# Altium PCB WCH_hairDrierCore_V1.5.PcbDoc (part 7 of 7)
Units mil, origin at the board's own origin, x right, y up, seen from the top; angles counter-clockwise.
Board outline 1683.54 x 992.13 mil, 4 copper layers (Top Layer, Mid-Layer 1, Mid-Layer 2, Bottom Layer); 84 components, 65 nets, 249 pads, 160 vias.
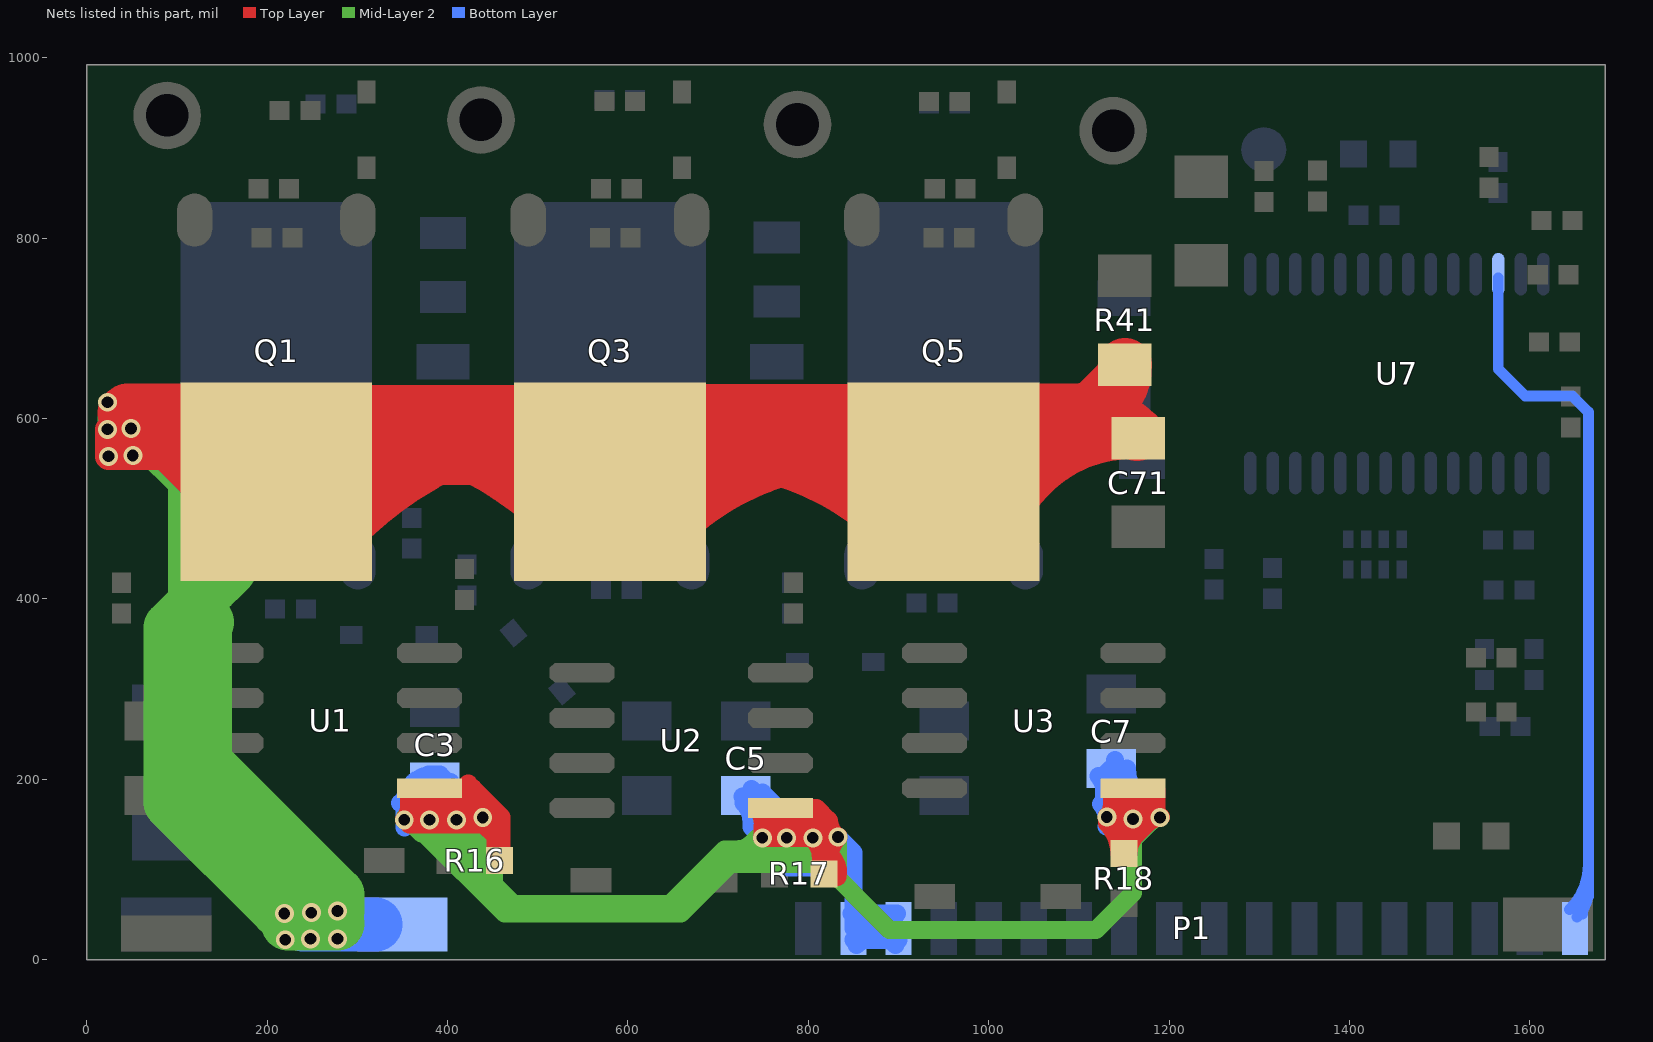
[diagram p9: the nets of this part, all layers, seen from the top]

## Via types
v1: diameter 21, hole 13, Top Layer to Bottom Layer, tented both sides, 155 vias
v2: diameter 25, hole 15, Top Layer to Bottom Layer, tented both sides, 5 vias

## Nets (pads, with @x,y where several pads share a name; then routed paths per layer and width w, separated by ;. In a path a pad name is that pad's centre, name@x,y a point inside that pad or via, vN(x,y) a via of type N, cw(c..) or ccw(c..) an arc to the next point about the centre after c; other vN are vias at no path point) (continued)
V12: C3.1 C5.1 C7.1 P1.16 P1.17 R16.2 R17.2 R18.2 U1.1 U2.1 U3.1 | length 14448.4
  Top Layer w20: v1@356.5,157.5 v1@444.5,157.5 ; v1@357,164 U1.1@357,181 ; U1.1@380,190 428,190 447.5,170.5 ; v1@445,150 v1@432,150 ; R16.2@453,114.5 453,137 ; R16.2@457.5,110 460,112.5 460,130 ; U2.1@775,162 U2.1@769,168 ; v1@777,135 777,160 U2.1@769,168 ; R17.2@814,98.5 814,126 ; 822,135 v1(805,135) ; R17.2@823,104 823,154 ; v1@1137,161 U3.1@1137,188 ; U3.1@1156,186 v1@1156,159 ; v1@1167,160 U3.1@1167,187 ; U3.1@1186,188 v1@1186,161 ; v1@1189.5,158 1144,158 ; v1(1190,157.5) v1@1190.5,157.5 ; v1@1191,158 v1@1190,157 ; v1@351.65,155.35 ccw(c338.72,168.28) 357,168.28 ; v1@351.65,155.35 ccw(c338.72,168.28) 357,168.28 ; v1@351.65,155.35 ccw(c338.72,168.28) 357,168.28 ; v1@351.67,155.38 ccw(c341.66,167) 357,167 ; v1@351.67,155.38 ccw(c341.66,167) 357,167 ; v1@351.67,155.38 ccw(c341.66,167) 357,167 ; v1@352.35,154.65 cw(c390.63,116.37) 390.63,170.5 ; v1@352.35,154.65 cw(c390.63,116.37) 390.63,170.5 ; v1@352.35,154.65 cw(c390.63,116.37) 390.63,170.5 ; v1@352.35,155.35 ccw(c365.28,168.28) 365.28,150 ; v1@352.35,155.35 ccw(c365.28,168.28) 365.28,150 ; v1@352.35,155.35 ccw(c365.28,168.28) 365.28,150 ; 357,167 357,150 v1@432,150 ; 359.5,170.5 cw(c359.5,149.87) v1@379.51,154.88 ; 359.5,170.5 cw(c359.5,149.87) v1@379.51,154.88 ; 359.5,170.5 cw(c359.5,149.87) v1@379.51,154.88 ; 359.5,170.5 447.5,170.5 ; 366.72,150 ccw(c366.72,168.28) v1@379.65,155.35 ; 366.72,150 ccw(c366.72,168.28) v1@379.65,155.35 ; 366.72,150 ccw(c366.72,168.28) v1@379.65,155.35 ; 371.37,170.5 cw(c371.37,116.37) v1@409.65,154.65 ; 371.37,170.5 cw(c371.37,116.37) v1@409.65,154.65 ; 371.37,170.5 cw(c371.37,116.37) v1@409.65,154.65 ; v1@380.35,154.65 cw(c418.63,116.37) 418.63,170.5 ; v1@380.35,154.65 cw(c418.63,116.37) 418.63,170.5 ; v1@380.35,154.65 cw(c418.63,116.37) 418.63,170.5 ; v1@380.35,155.35 ccw(c393.28,168.28) 393.28,150 ; v1@380.35,155.35 ccw(c393.28,168.28) 393.28,150 ; v1@380.35,155.35 ccw(c393.28,168.28) 393.28,150 ; 396.72,150 ccw(c396.72,168.28) v1@409.65,155.35 ; 396.72,150 ccw(c396.72,168.28) v1@409.65,155.35 ; 396.72,150 ccw(c396.72,168.28) v1@409.65,155.35 ; U1.1@405.78,190.62 ccw(c447.5,223.8) 447.5,170.5 ; U1.1@405.78,190.62 ccw(c447.5,223.8) 447.5,170.5 ; U1.1@405.78,190.62 ccw(c447.5,223.8) 447.5,170.5 ; 406.41,170.5 cw(c406.41,124.91) v1@438.65,157.15 ; 406.41,170.5 cw(c406.41,124.91) v1@438.65,157.15 ; 406.41,170.5 cw(c406.41,124.91) v1@438.65,157.15 ; v1@410.36,154.65 cw(c447.5,119.06) 447.5,170.5 ; v1@410.36,154.65 cw(c447.5,119.06) 447.5,170.5 ; v1@410.36,154.65 cw(c447.5,119.06) 447.5,170.5 ; v1@410.35,155.35 ccw(c423.28,168.28) 423.28,150 ; v1@410.35,155.35 ccw(c423.28,168.28) 423.28,150 ; v1@410.35,155.35 ccw(c423.28,168.28) 423.28,150 ; 419.69,150 ccw(c419.69,176.81) v1@438.65,157.85 ; 419.69,150 ccw(c419.69,176.81) v1@438.65,157.85 ; 419.69,150 ccw(c419.69,176.81) v1@438.65,157.85 ; 422.94,195.06 cw(c385.39,157.5) v1@438.5,157.5 ; 422.94,195.06 cw(c385.39,157.5) v1@438.5,157.5 ; 422.94,195.06 cw(c385.39,157.5) v1@438.5,157.5 ; v1@432,150 440,150 453,137 ; v1@439.5,157.5 ccw(c456.4,157.5) 444.45,145.55 ; v1@439.5,157.5 ccw(c456.4,157.5) 444.45,145.55 ; v1@439.5,157.5 ccw(c456.4,157.5) 444.45,145.55 ; 447.5,170.5 460,158 460,130 ; 453,132.93 ccw(c480.43,132.93) R16.2@461.04,113.54 ; 453,132.93 ccw(c480.43,132.93) R16.2@461.04,113.54 ; 453,132.93 ccw(c480.43,132.93) R16.2@461.04,113.54 ; 453,137 460,130 ; R16.2@453.96,113.54 ccw(c439.39,128.11) 460,128.11 ; R16.2@453.96,113.54 ccw(c439.39,128.11) 460,128.11 ; R16.2@453.96,113.54 ccw(c439.39,128.11) 460,128.11 ; R16.2@453.96,113.54 ccw(c439.39,128.11) 460,128.11 ; R16.2@453.96,113.54 ccw(c439.39,128.11) 460,128.11 ; R16.2@453.96,113.54 ccw(c439.39,128.11) 460,128.11 ; R16.2@453.96,113.54 ccw(c439.39,128.11) 460,128.11 ; R16.2@453.96,113.54 ccw(c439.39,128.11) 460,128.11 ; R16.2@453.96,113.54 ccw(c439.39,128.11) 460,128.11 ; U2.1@743.29,167.29 cw(c729.51,153.51) 749,153.51 ; U2.1@743.29,167.29 cw(c729.51,153.51) 749,153.51 ; U2.1@743.29,167.29 cw(c729.51,153.51) 749,153.51 ; U2.1@743.29,167.29 cw(c729.51,153.51) 749,153.51 ; U2.1@743.29,167.29 cw(c729.51,153.51) 749,153.51 ; U2.1@743.29,167.29 cw(c729.51,153.51) 749,153.51 ; v1@748.7,135.4 ccw(c730.25,160) U2.1@761,160 ; v1@748.7,135.4 ccw(c730.25,160) U2.1@761,160 ; v1@748.7,135.4 ccw(c730.25,160) U2.1@761,160 ; v1@749.5,135 cw(c782.09,135) U2.1@759.05,158.05 ; v1@749.5,135 cw(c782.09,135) U2.1@759.05,158.05 ; v1@749.5,135 cw(c782.09,135) U2.1@759.05,158.05 ; 761,135 U2.1@761,160 ; 761,135 789,135 ; 761,135 v1(749,135) 749,148 U2.1@769,168 ; 761,146.27 cw(c790.73,146.27) U2.1@769.71,167.29 ; 761,146.27 cw(c790.73,146.27) U2.1@769.71,167.29 ; 761,146.27 cw(c790.73,146.27) U2.1@769.71,167.29 ; U2.1@761,160 ccw(c788.41,160) v1@776.22,135.45 ; U2.1@761,160 ccw(c788.41,160) v1@776.22,135.45 ; U2.1@761,160 ccw(c788.41,160) v1@776.22,135.45 ; U2.1@768.29,167.29 cw(c747.27,146.27) 777,146.27 ; U2.1@768.29,167.29 cw(c747.27,146.27) 777,146.27 ; U2.1@768.29,167.29 cw(c747.27,146.27) 777,146.27 ; U2.1@769,168 789,148 ; U2.1@769,168 809,168 823,154 ; 789,135 789,148 ; 789,135 v1(805,135) ; 789,148 805,164 v1(805,135) ; 789,153.51 cw(c808.49,153.51) U2.1@794.71,167.29 ; 789,153.51 cw(c808.49,153.51) U2.1@794.71,167.29 ; 789,153.51 cw(c808.49,153.51) U2.1@794.71,167.29 ; 789,153.51 cw(c808.49,153.51) U2.1@794.71,167.29 ; 789,153.51 cw(c808.49,153.51) U2.1@794.71,167.29 ; 789,153.51 cw(c808.49,153.51) U2.1@794.71,167.29 ; U2.1@793.29,167.29 cw(c765.03,139.03) v1@805,139.03 ; U2.1@793.29,167.29 cw(c765.03,139.03) v1@805,139.03 ; U2.1@793.29,167.29 cw(c765.03,139.03) v1@805,139.03 ; U2.1@794,167 cw(c794,128.37) 821.31,155.69 ; U2.1@794,167 cw(c794,128.37) 821.31,155.69 ; U2.1@794,167 cw(c794,128.37) 821.31,155.69 ; U2.1@794.21,167.02 cw(c799.4,143.4) 816.5,160.5 ; U2.1@794.21,167.02 cw(c799.4,143.4) 816.5,160.5 ; U2.1@794.21,167.02 cw(c799.4,143.4) 816.5,160.5 ; v1@804.65,134.65 cw(c782.07,112.07) 814,112.07 ; v1@804.65,134.65 cw(c782.07,112.07) 814,112.07 ; v1@804.65,134.65 cw(c782.07,112.07) 814,112.07 ; v1@804.71,134.59 cw(c779.52,99.15) R17.2@823,99.15 ; v1@804.71,134.59 cw(c779.52,99.15) R17.2@823,99.15 ; v1@804.71,134.59 cw(c779.52,99.15) R17.2@823,99.15 ; v1(805,135) 814,126 ; v1@804.99,135.5 ccw(c804.49,154) 823,154 ; v1@804.99,135.5 ccw(c804.49,154) 823,154 ; v1@804.99,135.5 ccw(c804.49,154) 823,154 ; R17.2@813.96,98.54 ccw(c792.15,120.35) 823,120.35 ; R17.2@813.96,98.54 ccw(c792.15,120.35) 823,120.35 ; R17.2@813.96,98.54 ccw(c792.15,120.35) 823,120.35 ; 814,115.52 ccw(c838.02,115.52) R17.2@821.04,98.54 ; 814,115.52 ccw(c838.02,115.52) R17.2@821.04,98.54 ; 814,115.52 ccw(c838.02,115.52) R17.2@821.04,98.54 ; 814,126 823,117 ; R17.2@814.36,98.89 ccw(c799.7,117) 823,117 ; R17.2@814.36,98.89 ccw(c799.7,117) 823,117 ; R17.2@814.36,98.89 ccw(c799.7,117) 823,117 ; R17.2@815.51,99.59 ccw(c810.56,111) 823,111 ; R17.2@815.51,99.59 ccw(c810.56,111) 823,111 ; R17.2@815.51,99.59 ccw(c810.56,111) 823,111 ; 823,110.65 cw(c858.35,110.65) v1@833.35,135.65 ; 823,110.65 cw(c858.35,110.65) v1@833.35,135.65 ; 823,110.65 cw(c858.35,110.65) v1@833.35,135.65 ; 823,111 823,117 ; 823,154 ccw(c843.18,154) v1@833.25,136.44 ; 823,154 ccw(c843.18,154) v1@833.25,136.44 ; 823,154 ccw(c843.18,154) v1@833.25,136.44 ; 825.61,114.39 cw(c808.38,97.15) R17.2@832.1,91.55 ; 825.61,114.39 cw(c808.38,97.15) R17.2@832.1,91.55 ; 825.61,114.39 cw(c808.38,97.15) R17.2@832.1,91.55 ; v1@1130.66,157.63 cw(c1089.44,113.27) R18.2@1150,113.27 ; v1@1130.66,157.63 cw(c1089.44,113.27) R18.2@1150,113.27 ; v1@1130.66,157.63 cw(c1089.44,113.27) R18.2@1150,113.27 ; v1@1130.65,158.35 ccw(c1115.31,173.69) 1137,173.69 ; v1@1130.65,158.35 ccw(c1115.31,173.69) 1137,173.69 ; v1@1130.65,158.35 ccw(c1115.31,173.69) 1137,173.69 ; v1@1130.7,158.4 ccw(c1110.75,185) U3.1@1144,185 ; v1@1130.7,158.4 ccw(c1110.75,185) U3.1@1144,185 ; v1@1130.7,158.4 ccw(c1110.75,185) U3.1@1144,185 ; v1@1131,157.5 cw(c1130.85,138.35) 1150,138.35 ; v1@1131,157.5 cw(c1130.85,138.35) 1150,138.35 ; v1@1131,157.5 cw(c1130.85,138.35) 1150,138.35 ; v1@1131.21,150.79 cw(c1097.92,117.5) R18.2@1145,117.5 ; v1@1131.21,150.79 cw(c1097.92,117.5) R18.2@1145,117.5 ; v1@1131.21,150.79 cw(c1097.92,117.5) R18.2@1145,117.5 ; v1@1131.34,158.37 ccw(c1143.34,171.66) v1@1156,159 ; v1@1131.34,158.37 ccw(c1143.34,171.66) v1@1156,159 ; v1@1131.34,158.37 ccw(c1143.34,171.66) v1@1156,159 ; v1@1131.5,158 ccw(c1149.61,158) 1136.8,145.2 ; v1@1131.5,158 ccw(c1149.61,158) 1136.8,145.2 ; v1@1131.5,158 ccw(c1149.61,158) 1136.8,145.2 ; U3.1@1134.29,189.29 cw(c1110.86,165.86) 1144,165.86 ; U3.1@1134.29,189.29 cw(c1110.86,165.86) 1144,165.86 ; U3.1@1134.29,189.29 cw(c1110.86,165.86) 1144,165.86 ; 1144,158 v1(1131,158) 1131,151 1150,132 R18.2@1150,117.5 ; 1144,158 U3.1@1144,185 ; U3.1@1144,185 ccw(c1177.23,185) v1@1160.26,156.43 ; U3.1@1144,185 ccw(c1177.23,185) v1@1160.26,156.43 ; U3.1@1144,185 ccw(c1177.23,185) v1@1160.26,156.43 ; R18.2@1150,117.5 1150,153 v1@1156,159 ; R18.2@1150,117.5 1150,125 v1@1186,161 ; R18.2@1150,130.65 cw(c1185.35,130.65) v1@1160.35,155.65 ; R18.2@1150,130.65 cw(c1185.35,130.65) v1@1160.35,155.65 ; R18.2@1150,130.65 cw(c1185.35,130.65) v1@1160.35,155.65 ; R18.2@1155,117.5 cw(c1185.18,117.5) 1163.84,138.84 ; R18.2@1155,117.5 cw(c1185.18,117.5) 1163.84,138.84 ; R18.2@1155,117.5 cw(c1185.18,117.5) 1163.84,138.84 ; 1156,166.86 ccw(c1170.86,166.86) v1@1160.35,156.35 ; 1156,166.86 ccw(c1170.86,166.86) v1@1160.35,156.35 ; 1156,166.86 ccw(c1170.86,166.86) v1@1160.35,156.35 ; 1156,177.93 cw(c1172.07,177.93) U3.1@1160.71,189.29 ; 1156,177.93 cw(c1172.07,177.93) U3.1@1160.71,189.29 ; 1156,177.93 cw(c1172.07,177.93) U3.1@1160.71,189.29 ; U3.1@1159.29,189.29 cw(c1140.69,170.69) 1167,170.69 ; U3.1@1159.29,189.29 cw(c1140.69,170.69) 1167,170.69 ; U3.1@1159.29,189.29 cw(c1140.69,170.69) 1167,170.69 ; v1@1159.65,156.35 ccw(c1141.89,174.11) 1167,174.11 ; v1@1159.65,156.35 ccw(c1141.89,174.11) 1167,174.11 ; v1@1159.65,156.35 ccw(c1141.89,174.11) 1167,174.11 ; v1@1160.21,156.45 ccw(c1169.86,177.14) v1@1186,161 ; v1@1160.21,156.45 ccw(c1169.86,177.14) v1@1186,161 ; v1@1160.21,156.45 ccw(c1169.86,177.14) v1@1186,161 ; 1176.34,151.34 cw(c1190,137.69) v1@1190,157 ; 1176.34,151.34 cw(c1190,137.69) v1@1190,157 ; 1176.34,151.34 cw(c1190,137.69) v1@1190,157 ; 1186,168.36 ccw(c1200.86,168.36) v1@1190.35,157.85 ; 1186,168.36 ccw(c1200.86,168.36) v1@1190.35,157.85 ; 1186,168.36 ccw(c1200.86,168.36) v1@1190.35,157.85
  Mid-Layer 2 w20: 374,140 463,51 659,51 714,106 812,106 v1@833,127 ; 387,140 395,140 439,96 ; v1@436.5,155 v1(352,155) 356,155 371,140 400,140 ; 439,120 419,140 416,140 ; 439,131 439,125 451.5,112.5 451.5,83.5 ; v1(439,157.5) 439,103 439,96 ; 730,122 743,135 v1(749,135) 762,122 ; v1@750,136 v1(833,136) v1@833,127 ; v1(805,135) 805,118 890,33 1119,33 1160,74 1160,133 ; 836,87 833,90 v1@833,127 ; 1160,129 v1(1131,158) 1131.5,157.5 v1(1190,157.5) ; v1(1160,156) 1160,133 ; v1@353,158 ccw(c367.93,172.93) v1@379.72,155.41 ; v1@353,158 ccw(c367.93,172.93) v1@379.72,155.41 ; v1@353,158 ccw(c367.93,172.93) v1@379.72,155.41 ; 372.58,140 ccw(c372.58,192.42) v1@409.65,155.35 ; 372.58,140 ccw(c372.58,192.42) v1@409.65,155.35 ; 372.58,140 ccw(c372.58,192.42) v1@409.65,155.35 ; v1@380.5,155 ccw(c432.41,155) 395.7,118.3 ; v1@380.5,155 ccw(c432.41,155) 395.7,118.3 ; v1@380.5,155 ccw(c432.41,155) 395.7,118.3 ; v1@380.48,155.12 ccw(c400,160.15) 400,140 ; v1@380.48,155.12 ccw(c400,160.15) 400,140 ; v1@380.48,155.12 ccw(c400,160.15) 400,140 ; 400,140 416,140 ; 400,140 439,101 439,96 ; v1@410.42,155.28 ccw(c439,174.38) 439,140 ; v1@410.42,155.28 ccw(c439,174.38) 439,140 ; v1@410.42,155.28 ccw(c439,174.38) 439,140 ; v1@410.5,154.98 ccw(c465.28,152.29) 426.5,113.5 ; v1@410.5,155 ccw(c426.19,155) 415.1,143.9 ; v1@410.5,155 ccw(c426.19,155) 415.1,143.9 ; v1@410.5,154.98 ccw(c465.28,152.29) 426.5,113.5 ; v1@410.5,155 ccw(c426.19,155) 415.1,143.9 ; v1@410.5,155 ccw(c426.19,155) 415.1,143.9 ; v1@410.5,155 ccw(c426.19,155) 415.1,143.9 ; v1@410.5,155 ccw(c426.19,155) 415.1,143.9 ; v1@410.5,154.98 ccw(c465.28,152.29) 426.5,113.5 ; 416,140 ccw(c416,163.19) v1@438.51,157.62 ; 416,140 ccw(c416,163.19) v1@438.51,157.62 ; 416,140 ccw(c416,163.19) v1@438.51,157.62 ; 416,140 439,140 ; 439,96 451.5,83.5 ; 451.5,83.5 473.22,61.78 646.78,61.78 707,122 762,122 ; 716.41,122 ccw(c716.41,167.59) v1@748.65,135.35 ; 716.41,122 ccw(c716.41,167.59) v1@748.65,135.35 ; 716.41,122 ccw(c716.41,167.59) v1@748.65,135.35 ; 737.9,129.9 cw(c749,118.81) v1@749,134.5 ; 737.9,129.9 cw(c749,118.81) v1@749,134.5 ; 737.9,129.9 cw(c749,118.81) v1@749,134.5 ; 743.41,122 ccw(c743.41,167.59) v1@775.65,135.35 ; 743.41,122 ccw(c743.41,167.59) v1@775.65,135.35 ; 743.41,122 ccw(c743.41,167.59) v1@775.65,135.35 ; v1@749.35,135.35 ccw(c781.59,167.59) 781.59,122 ; v1@749.35,135.35 ccw(c781.59,167.59) 781.59,122 ; v1@749.35,135.35 ccw(c781.59,167.59) 781.59,122 ; 762,122 ccw(c762,135.51) v1@775.5,135.02 ; 762,122 ccw(c762,135.51) v1@775.5,135.02 ; 762,122 ccw(c762,135.51) v1@775.5,135.02 ; 762,122 ccw(c762,135.51) v1@775.5,135.02 ; 762,122 ccw(c762,135.51) v1@775.5,135.02 ; 762,122 ccw(c762,135.51) v1@775.5,135.02 ; 762,122 828,122 ; 772.41,122 ccw(c772.41,167.59) v1@804.65,135.35 ; 772.41,122 ccw(c772.41,167.59) v1@804.65,135.35 ; 772.41,122 ccw(c772.41,167.59) v1@804.65,135.35 ; v1@776.35,135.35 ccw(c808.59,167.59) 808.59,122 ; v1@776.35,135.35 ccw(c808.59,167.59) 808.59,122 ; v1@776.35,135.35 ccw(c808.59,167.59) 808.59,122 ; 797.99,122 ccw(c797.99,171.01) v1@832.65,136.35 ; 797.99,122 ccw(c797.99,171.01) v1@832.65,136.35 ; 797.99,122 ccw(c797.99,171.01) v1@832.65,136.35 ; v1@805.44,135.24 ccw(c828,147.84) 828,122 ; v1@805.44,135.24 ccw(c828,147.84) 828,122 ; v1@805.44,135.24 ccw(c828,147.84) 828,122 ; v1@805.5,135 ccw(c847.75,135) 817.87,105.13 ; v1@805.5,135 ccw(c847.75,135) 817.87,105.13 ; v1@805.5,135 ccw(c847.75,135) 817.87,105.13 ; 825.78,119.78 ccw(c809.57,136) v1@832.5,136 ; 825.78,119.78 ccw(c809.57,136) v1@832.5,136 ; 825.78,119.78 ccw(c809.57,136) v1@832.5,136 ; 828,122 v1@833,127 ; 1160,133 v1@1184.5,157.5 ; v1@1160.32,156.38 ccw(c1171.8,170.2) v1@1184.5,157.5 ; v1@1160.32,156.38 ccw(c1171.8,170.2) v1@1184.5,157.5 ; v1@1160.32,156.38 ccw(c1171.8,170.2) v1@1184.5,157.5 ; 1179.76,152.76 cw(c1190,142.51) v1@1190,157 ; 1179.76,152.76 cw(c1190,142.51) v1@1190,157 ; 1179.76,152.76 cw(c1190,142.51) v1@1190,157
  Bottom Layer w20: 347.44,173.44 cw(c375.88,145) C3.1@378.95,185.1 ; v1@352,146.57 cw(c391.94,146.57) C3.1@382.58,185.4 ; 352,171.96 cw(c385.82,171.96) C3.1@377.88,204.84 ; v1@358.94,161.94 ccw(c334.06,186.82) C3.1@368.45,194.26 ; C3.1@361.57,176.43 ccw(c380.56,195.41) 393.46,171.86 ; C3.1@377.51,188.48 cw(c354.59,165.57) 387,165.57 ; v1@378,160 367.5,170.5 ; C3.1@385.72,186.7 cw(c367.76,156.37) v1@403,156.37 ; v1@387,160 C3.1@387,192 ; 387,171.61 cw(c410.86,171.61) C3.1@393.99,188.48 ; C3.1@391.65,185.07 cw(c391.65,137.33) 425.41,171.09 ; v1@403,158 403,173 ; C3.1@403.31,196.72 ccw(c454.08,196.72) v1@418.18,160.82 ; 424,155 C3.1@403,176 ; v1@436.5,155 v1(352,155) ; v1(439,157.5) 423.5,173 ; C5.1@727,181 C5.1@737,171 ; C5.1@728.41,173.48 cw(c707.68,152.75) 737,152.75 ; C5.1@729.61,172.44 cw(c700,133.4) v1@749,133.4 ; C5.1@736.65,170.07 cw(c736.65,104.22) 783.22,150.78 ; 737,154.43 cw(c763.95,154.43) C5.1@744.89,173.48 ; C5.1@749,185 776,158 ; v1@774,133 774,102 ; v1@799,135 786,148 776,158 ; v1@804,136 v1(833,136) 850.04,118.96 850.04,79.96 P1.17@850.04,34.61 P1.16@900.04,34.61 ; 847.04,79.96 825,102 ; 847.04,102 825,102 ; P1.17@848.04,51 P1.16@898.04,51 ; P1.17@850.04,22 P1.16@900.04,22 ; 1130.5,147.5 cw(c1152.2,125.8) v1@1159.88,155.52 ; C7.1@1133.41,203.48 cw(c1117.51,187.58) 1140,187.58 ; 1140,179.6 cw(c1173.78,179.6) C7.1@1149.89,203.48 ; C7.1@1140,219 1140,221.5 1140,190 ; C7.1@1151.46,205.42 ccw(c1172.51,191.89) 1154.81,174.19 ; C7.1@1153.31,211.72 ccw(c1195.7,211.72) 1165.72,181.75 ; 1154.5,171.5 v1@1140,157 ; v1@1159.97,156.5 ccw(c1159,172.47) 1175,172.47 ; v1(1160,156) 1162,158 1175,158 ; 1170,162 v1@1167,162 ; v1(1190,157.5) 1190,157.89 1189.89,158 1175,158 ; v1(352,155) 352,178 379,205 391.5,205 423.5,173 ; v1(352,155) 367.5,170.5 ; 367.5,170.5 C3.1@387,190 ; v1@379.65,155.35 ccw(c361.89,173.11) 387,173.11 ; v1@379.65,155.35 ccw(c361.89,173.11) 387,173.11 ; v1@379.65,155.35 ccw(c361.89,173.11) 387,173.11 ; v1@380.46,155.2 cw(c409.18,167.82) C3.1@387,190 ; v1@380.46,155.2 cw(c409.18,167.82) C3.1@387,190 ; v1@380.46,155.2 cw(c409.18,167.82) C3.1@387,190 ; C3.1@387,190 387,205 C3.1@387,192 ; C3.1@387,192 C3.1@403,176 ; C3.1@387,199.5 cw(c387,175.36) 404.07,192.43 ccw(c387,175.36) C3.1@387,199.5 ; C3.1@387,199.5 ccw(c387,166.91) 363.95,189.95 cw(c387,166.91) C3.1@387,199.5 ; C3.1@399.25,179.75 cw(c374.49,155) v1@409.5,155 ; C3.1@399.25,179.75 cw(c374.49,155) v1@409.5,155 ; C3.1@399.25,179.75 cw(c374.49,155) v1@409.5,155 ; 403,173 ccw(c427.85,173) v1@410.35,155.36 ; 403,173 ccw(c427.85,173) v1@410.35,155.36 ; 403,173 ccw(c427.85,173) v1@410.35,155.36 ; 403,173 ccw(c427.85,173) v1@410.35,155.36 ; 403,173 ccw(c427.85,173) v1@410.35,155.36 ; 403,173 ccw(c427.85,173) v1@410.35,155.36 ; 403,173 423.5,173 ; 403,173 C3.1@403,176 ; 403,173.11 ccw(c428.11,173.11) v1@410.35,155.35 ; 403,173.11 ccw(c428.11,173.11) v1@410.35,155.35 ; 403,173.11 ccw(c428.11,173.11) v1@410.35,155.35 ; v1@410.09,154.51 cw(c414.35,131.35) 431,148 ; v1@410.09,154.51 cw(c414.35,131.35) 431,148 ; v1@410.09,154.51 cw(c414.35,131.35) 431,148 ; 411.75,167.25 ccw(c434.74,190.24) v1@438.94,158 ; 411.75,167.25 ccw(c434.74,190.24) v1@438.94,158 ; 411.75,167.25 ccw(c434.74,190.24) v1@438.94,158 ; C5.1@737,165.18 ccw(c779.18,165.18) v1@749.35,135.35 ; C5.1@737,165.18 ccw(c779.18,165.18) v1@749.35,135.35 ; C5.1@737,165.18 ccw(c779.18,165.18) v1@749.35,135.35 ; C5.1@737,171 737,189 749,177 v1(749,135) ; C5.1@737,171 737,147 v1(749,135) ; v1(749,135) 763,149 772,158 776,158 ; v1(749,135) 765,135 ; v1(749,135) 774,110 774,102 ; v1@749.02,135.5 ccw(c750.57,171.43) 776,146 ; v1@749.02,135.5 ccw(c750.57,171.43) 776,146 ; v1@749.02,135.5 ccw(c750.57,171.43) 776,146 ; 759.5,129.5 cw(c772.41,116.59) v1@775.9,134.51 ; 759.5,129.5 cw(c772.41,116.59) v1@775.9,134.51 ; 759.5,129.5 cw(c772.41,116.59) v1@775.9,134.51 ; 765,135 v1(805,135) ; 765,135 776,146 ; 774,102 774,104 789,119 ; 774,102 825,102 ; 776,146 776,158 ; 776,158 782,158 v1(805,135) ; 789,119 v1(805,135) ; 789,119 838,119 ; 790.75,119 ccw(c790.75,178.25) v1@832.65,136.35 ; 790.75,119 ccw(c790.75,178.25) v1@832.65,136.35 ; 790.75,119 ccw(c790.75,178.25) v1@832.65,136.35 ; 793.9,140.1 ccw(c805,151.19) v1@805,135.5 ; 793.9,140.1 ccw(c805,151.19) v1@805,135.5 ; 793.9,140.1 ccw(c805,151.19) v1@805,135.5 ; v1@805.4,135.3 ccw(c838,159.75) 838,119 ; v1@805.4,135.3 ccw(c838,159.75) 838,119 ; v1@805.4,135.3 ccw(c838,159.75) 838,119 ; P1.17@853.27,16.42 cw(c866.74,2.94) 866.74,22 ; P1.17@853.27,16.42 cw(c866.74,2.94) 866.74,22 ; P1.17@853.27,16.42 cw(c866.74,2.94) 866.74,22 ; 883.34,22 cw(c883.34,2.94) P1.16@896.81,16.42 ; 883.34,22 cw(c883.34,2.94) P1.16@896.81,16.42 ; 883.34,22 cw(c883.34,2.94) P1.16@896.81,16.42 ; 1124.49,172.51 cw(c1109.98,158) v1@1130.5,158 ; 1124.49,172.51 cw(c1109.98,158) v1@1130.5,158 ; 1124.49,172.51 cw(c1109.98,158) v1@1130.5,158 ; 1128,169 C7.1@1128,203.98 ; 1128,169 C7.1@1128,203.98 ; 1128,169 v1@1140,157 ; C7.1@1128,203.98 C7.1@1135.75,211.72 1175,172.47 ; v1@1130.65,158.35 ccw(c1108.07,180.93) 1140,180.93 ; v1@1130.65,158.35 ccw(c1108.07,180.93) 1140,180.93 ; v1@1130.65,158.35 ccw(c1108.07,180.93) 1140,180.93 ; v1@1131,158.5 ccw(c1131,183.85) 1148.92,165.92 ; v1@1131,158.5 ccw(c1131,183.85) 1148.92,165.92 ; v1@1131,158.5 ccw(c1131,183.85) 1148.92,165.92 ; v1@1137.5,159.5 ccw(c1150.65,172.65) v1@1159.76,156.44 ; v1@1137.5,159.5 ccw(c1150.65,172.65) v1@1159.76,156.44 ; v1@1137.5,159.5 ccw(c1150.65,172.65) v1@1159.76,156.44 ; v1@1140,157 1140,190 ; v1@1140,157 1141,158 1171,158 v1@1167,162 ; 1140,190 ccw(c1177.94,190) v1@1160.23,156.44 ; 1140,190 ccw(c1177.94,190) v1@1160.23,156.44 ; 1140,190 ccw(c1177.94,190) v1@1160.23,156.44 ; 1140,190 1140,189 v1@1167,162 ; 1149.95,179.05 cw(c1126.91,156) v1@1159.5,156 ; 1149.95,179.05 cw(c1126.91,156) v1@1159.5,156 ; 1149.95,179.05 cw(c1126.91,156) v1@1159.5,156 ; v1@1160.16,155.53 cw(c1165.6,139.6) 1177.5,151.5 ; v1@1160.16,155.53 cw(c1165.6,139.6) 1177.5,151.5 ; v1@1160.16,155.53 cw(c1165.6,139.6) 1177.5,151.5 ; 1175,158 1175,172.47 ; 1177.93,162 cw(c1177.93,145.43) v1@1189.65,157.15 ; 1177.93,162 cw(c1177.93,145.43) v1@1189.65,157.15 ; 1177.93,162 cw(c1177.93,145.43) v1@1189.65,157.15 ; 1177.93,162 cw(c1177.93,145.43) v1@1189.65,157.15 ; 1177.93,162 cw(c1177.93,145.43) v1@1189.65,157.15 ; 1177.93,162 cw(c1177.93,145.43) v1@1189.65,157.15 ; C3.1@374.75,177.75 ccw(c355.27,197.23) 382.13,203.38 cw(c355.27,197.23) C3.1@374.75,177.75 ; C3.1@391.76,202.96 ccw(c411.19,196.69) 396.75,182.25 cw(c411.19,196.69) C3.1@391.76,202.96 ; C7.1@1121.6,203.48 cw(c1106.16,188.04) 1128,188.04 ccw(c1106.16,188.04) C7.1@1121.6,203.48 ; 1128,179.14 cw(c1162.42,179.14) 1138.08,203.48 ccw(c1162.42,179.14) 1128,179.14
  other v1: 776,135 380,155 410,155
V310: C71.1 pad.0@350,39 Q1.2 Q3.2 Q5.2 R41.2 | length 16968.1
  Top Layer w30: v1@24,563.98 cw(c54.02,563.98) v1@48.12,593.41 ; v1@24,588 v1(24,558) 85,558 ; v1@24.71,557.88 cw(c77.43,549.18) v1@46.39,592.66 ; Q1.2@115,528 85,558 ; Q1.2@117,558 85,558 ; Q1.2@118.98,526.58 ccw(c85,523.92) 85,558 ; Q1.2@133.97,584.24 cw(c85.01,616.79) 85.01,558
  Top Layer w60: 42,606 45,609 ; Q1.2@110.31,609 cw(c110.31,525.25) Q1.2@193.76,532.32 ; Q1.2@130,609 92,609 45,609 ; Q1.2@133.97,527.26 ccw(c45.01,519.71) 45.01,609 ; Q1.2@134.92,520.11 ccw(c68,508) 68,576 ; Q1.2@184,576 Q1.2@106,576 ; Q1.2@221.53,522.18 cw(c426.31,317.39) 426.31,607 ; Q1.2@222.52,523.27 cw(c315.89,445.46) Q1.2@315.89,567 ; Q1.2@239,567 444,567 ; Q1.2@240,540 230,530 318,530 ; Q1.2@263.95,479.75 cw(c571.16,172.54) Q3.2@571.16,607 ; Q1.2@263.95,587.65 ccw(c313.81,637.51) Q1.2@313.81,567 ; Q1.2@268.62,484.86 cw(c443.99,338.72) 443.99,567 ; Q1.2@281.91,504.51 cw(c318,491.72) 318,530 ; Q1.2@281.91,555.49 ccw(c318,568.28) 318,530 ; Q1.2@283.95,479.75 cw(c591.16,172.54) Q3.2@591.16,607 ; Q1.2@291.91,489.11 cw(c443.99,379.59) 443.99,567 ; 349.74,567 ccw(c349.74,413.96) Q1.2@241.53,522.18 ; 355,567 344,556 554,556 Q3.2@580,530 ; 369.79,607 cw(c369.79,331.9) Q3.2@568.24,522.41 ; 460.26,567 cw(c460.26,413.96) Q3.2@568.47,522.18 ; 470.26,567 cw(c470.26,413.96) Q3.2@578.47,522.18 ; Q3.2@476.19,567 ccw(c476.19,637.51) Q3.2@526.05,587.65 ; Q3.2@504.28,524.33 ccw(c456,518.36) 456,567 ; Q3.2@505,518 456,567 ; Q3.2@505.44,517.49 ccw(c444,504.12) 444,567 ; Q3.2@515.22,518.57 ccw(c456,506.59) 456,567 ; Q3.2@536.03,479.77 ccw(c229.02,172.97) 229.02,607 Q3.2@640,607 ; Q3.2@584,608 Q5.2@995,608 ; Q3.2@588,566 Q5.2@999,566 ; Q3.2@599,567 456,567 ; Q3.2@633.95,587.65 ccw(c686.23,639.93) Q3.2@686.23,566 ; 697.33,566 ccw(c697.33,416.38) 591.53,522.18 cw(c798.72,314.98) 798.72,608 ; 842.18,566 ccw(c842.18,271.52) 633.95,479.75 cw(c943.58,170.13) Q5.2@943.58,608 ; Q5.2@986.47,609 1096,609 ; Q5.2@1005.47,585 C71.1@1160,585 ; 1100.23,596.23 R41.2@1146,642 ; 1104.95,609 ccw(c1104.95,654.57) R41.2@1150.32,650.26 ; 1141,609 1096,609 ; 68.01,576 cw(c68.01,482.37) 157.27,510.65 ccw(c68.01,482.37) 68.01,576 ; 68,576 Q1.2@106,576 ; Q1.2@106,576 cw(c106,528.18) Q1.2@153.78,530.31 ; Q1.2@106,576 cw(c106,528.18) Q1.2@153.78,530.31 ; Q1.2@106,576 cw(c106,528.18) Q1.2@153.78,530.31 ; Q1.2@106,576 cw(c106,528.18) Q1.2@153.78,530.31 ; Q1.2@241.53,522.18 cw(c446.31,317.39) 446.31,607 ccw(c446.31,317.39) Q1.2@241.53,522.18 ; Q3.2@578.47,522.18 ccw(c373.8,317.65) 373.8,607 cw(c373.8,317.65) Q3.2@578.47,522.18 ; Q3.2@586.42,608 cw(c586.42,170.13) Q5.2@896.05,479.75 ; Q3.2@586.42,608 cw(c586.42,170.13) Q5.2@896.05,479.75 ; Q3.2@586.42,608 cw(c586.42,170.13) Q5.2@896.05,479.75 ; Q3.2@601.53,522.18 cw(c707.33,416.38) 707.33,566 ccw(c707.33,416.38) Q3.2@601.53,522.18 ; Q3.2@601.53,522.18 cw(c808.72,314.98) 808.72,608 ccw(c808.72,314.98) Q3.2@601.53,522.18 ; Q3.2@643.95,479.75 cw(c852.18,271.52) 852.18,566 ccw(c852.18,271.52) Q3.2@643.95,479.75 ; Q3.2@643.95,479.75 cw(c953.58,170.13) 953.58,608 ccw(c953.58,170.13) Q3.2@643.95,479.75 ; 687.82,566 cw(c687.82,271.52) Q5.2@896.05,479.75 ; 687.82,566 cw(c687.82,271.52) Q5.2@896.05,479.75 ; 687.82,566 cw(c687.82,271.52) Q5.2@896.05,479.75 ; 731.28,608 cw(c731.28,314.98) Q5.2@938.47,522.18 ; 731.28,608 cw(c731.28,314.98) Q5.2@938.47,522.18 ; 731.28,608 cw(c731.28,314.98) Q5.2@938.47,522.18 ; 832.67,566 cw(c832.67,416.38) Q5.2@938.47,522.18 ; 832.67,566 cw(c832.67,416.38) Q5.2@938.47,522.18 ; 832.67,566 cw(c832.67,416.38) Q5.2@938.47,522.18 ; Q5.2@843.77,566 ccw(c843.77,639.93) Q5.2@896.05,587.65 ; Q5.2@843.77,566 ccw(c843.77,639.93) Q5.2@896.05,587.65 ; Q5.2@843.77,566 ccw(c843.77,639.93) Q5.2@896.05,587.65 ; Q5.2@964.47,526.19 cw(c1061.25,475.96) 1061.25,585 ; Q5.2@964.47,526.19 cw(c1061.25,475.96) 1061.25,585 ; Q5.2@964.47,526.19 cw(c1061.25,475.96) 1061.25,585 ; Q5.2@1017.72,498.55 cw(c1159.99,424.7) C71.1@1159.99,585 ; Q5.2@1017.72,498.55 cw(c1159.99,424.7) C71.1@1159.99,585 ; Q5.2@1017.72,498.55 cw(c1159.99,424.7) C71.1@1159.99,585 ; 1096,609 ccw(c1096,664.42) 1151.17,659.17 cw(c1096,664.42) 1096,609 ; 1100.85,609 cw(c1100.85,519.23) C71.1@1164.33,582.71 ; 1100.85,609 cw(c1100.85,519.23) C71.1@1164.33,582.71 ; 1100.85,609 cw(c1100.85,519.23) C71.1@1164.33,582.71 ; Q1.2@283.95,587.65 ccw(c333.81,637.51) 333.81,567 cw(c333.81,637.51) Q1.2@283.95,587.65 ; Q3.2@486.19,567 ccw(c486.19,637.51) 536.05,587.65 cw(c486.19,637.51) Q3.2@486.19,567 ; Q3.2@643.95,587.65 ccw(c696.23,639.93) 696.23,566 cw(c696.23,639.93) Q3.2@643.95,587.65
  Mid-Layer 2 w60: 42,599 70,599 101,599 118.5,581.5 ; 62,575 39,575 39,580 40.5,581.5 68.5,581.5 94,581.5 ; 72,581.5 120,533.5 120,399 ; 133,374 131,374 ; 136,214 278,72 v1(278,54) 223,54 131,146 131,374 ; 138.5,413.5 138.5,561.5 ; 138.5,536 138.5,537 94,581.5 ; v1@212,55 93,174 93,368 131,406 ; 223,40 278,40 ; 94,581.5 118.5,581.5 ; 118.5,581.5 138.5,561.5 ; 120,399 131,406 ; 120,399 131,374 ; 131,406 158,433 158,542 138.5,561.5
  Bottom Layer w60: 240,39 pad.0@320,39
  other v1: 220,22 248,23 278,23 219,51 249,52 51,559 23,588 49,589 23,618
ZERO_CHK: P1.1 U7.12 | length 1109.4
  Bottom Layer w12: U7.12@1565,756 1565,655 1595,625 1647,625 1665,607 1665,70 ; P1.1@1652,57 1665,70 ; P1.1@1643.98,55.63 ccw(c1593.24,106.37) 1665,106.37 ; P1.1@1643.98,55.63 ccw(c1593.24,106.37) 1665,106.37 ; P1.1@1643.98,55.63 ccw(c1593.24,106.37) 1665,106.37 ; P1.1@1652.47,47.14 ccw(c1622.21,77.4) 1665,77.4 ; P1.1@1652.47,47.14 ccw(c1622.21,77.4) 1665,77.4 ; P1.1@1652.47,47.14 ccw(c1622.21,77.4) 1665,77.4 ; P1.1@1658.53,50.74 cw(c1681.14,53.86) 1665,70 ; P1.1@1658.53,50.74 cw(c1681.14,53.86) 1665,70 ; P1.1@1658.53,50.74 cw(c1681.14,53.86) 1665,70

## Polygon pours and split planes (outlines as drawn)
GND on Mid-Layer 1 "Bottom Layer-No Net" (solid, remove dead copper, pour order 1010): 15.98,638.94 27.91,627 1261,627 1261,338 1375,224 1358,207 1358,12 325,12 296,41 261,76 178,76 42,76 22,96
GND on Mid-Layer 1 "Bottom Layer-No Net" (solid, remove dead copper, pour order 1008): 25,971 36,982 1669,982 1669,882 1661,874 1392,605 1069,605 16,605 12,609
GND on Mid-Layer 1 "Bottom Layer-No Net" (solid, remove dead copper, pour order 1011): 1141,933 1144,930 1669,930 1669,53.04 1642,26.01 1632,16 1317,16 1317,160.16 1290,187.19 1199,278.29 1199,452.48 1199,569.47 1186.86,581.62 1148,620.52 1148,735.79
GND on Bottom Layer "Bottom Layer-No Net" (solid, remove dead copper, pour order 1012): 1040,136 1042,138 1107,138 1107,131 1115,123 1113,121 1113,29 1113,15 1108,10 1106,12 996,12 996,58 998,60 999,61 1041,61
V3.3 on Mid-Layer 2 "Top Layer-No Net" (solid, remove dead copper, pour order 1007): 1481,662 1553,662 1553,534 1543.37,524.37 1535,516 1535,479 1550.71,463.29 1555,459 1630,459 1630,377 1626,373 1615.88,383.12 1609.88,383.12 1573,420 1532,420 1490,462 1490,637
GND on Top Layer "Top Layer-No Net" (solid, remove dead copper, pour order 1006): 1365,847 1451,847 1467.03,847 1490.98,823.05 1492,822.03 1492,782 1460,782 1425,747 1423.67,748.33 1389.34,748.33 1314.67,748.33 1307,756 1300,763 1300,808
GND on Top Layer "Top Layer-No Net" (solid, remove dead copper, pour order 1009): 1309.5,817 1310.14,816.36 1650.49,816.36 1650.49,285.49 1626,261 1617,252 1583,252 1516,252 1515,251 1507,243 1507,184 1507,102.5 1507.5,102 1508,101.5 1508,68 1492,68 1431,129 1424,136 1315,136 1315,748 1300,763

## Other copper
Top Layer:
  rectangle net GND: 1468,103 1501,185
  rectangle net GND: 1312,785 1374,833
  rectangle net GND: 1361,780 1410,823
  rectangle net GND: 1564,631 1608,762
Mid-Layer 1:
  rectangle net GND: 1067,848 1213,976
  rectangle net GND: 21.95,5 138,100.2
  rectangle net GND: 1141.99,824 1238,926
  pour cut-out: 298,204 298,170 303,165 335,165 335,198 330,203
  pour cut-out: 1568,244 1568,210 1573,205 1605,205 1605,238 1600,243
Bottom Layer:
  rectangle net GND: 1440,801 1471,821.15
  rectangle net V310: 209,9 262,67
  rectangle net GND: 1049,10 1098,93
  rectangle net GND: 951,14 1061,57

## Silkscreen, mask and mechanical layers (free items; w line width, h text height)
Top Overlay:
  text "W" at 12,946 h50
Bottom Overlay:
  text "W" at 12,945 h50
  text "GND" at 1299,931 h70
  text "U_TX" at 1269,928 h36 r90
  text "V" at 337,910 h100
  text "U" at 693,907 h100
  text "WCH_hairDriverCore_V1.5" at 907,81 h66
Mechanical 1:
  the board outline again, w10